# Altium PCB estop-lora-esp32.PcbDoc
Units mil, origin at the board's own origin, x right, y up, seen from the top; angles counter-clockwise.
Board outline 3705.17 x 2376.14 mil, 2 copper layers (Top Layer, Bottom Layer); 7 components, 11 nets, 67 pads, 6 vias.
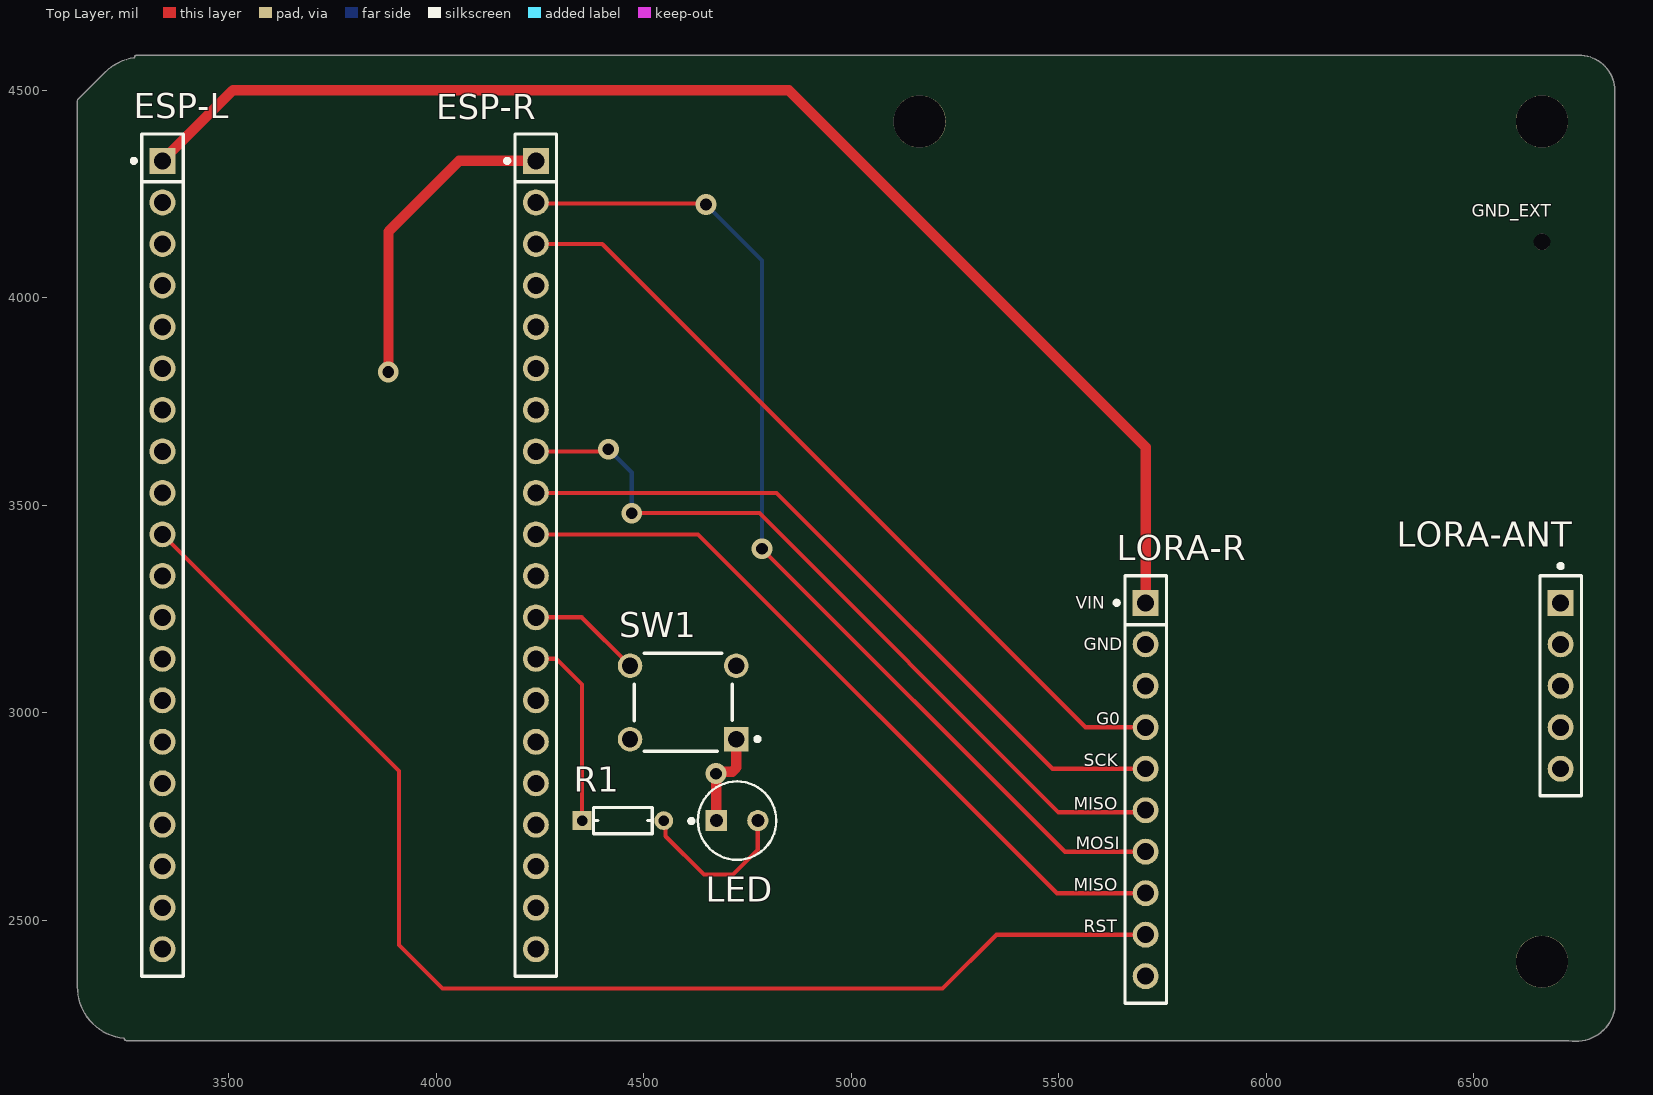
[diagram p0: Top Layer view]
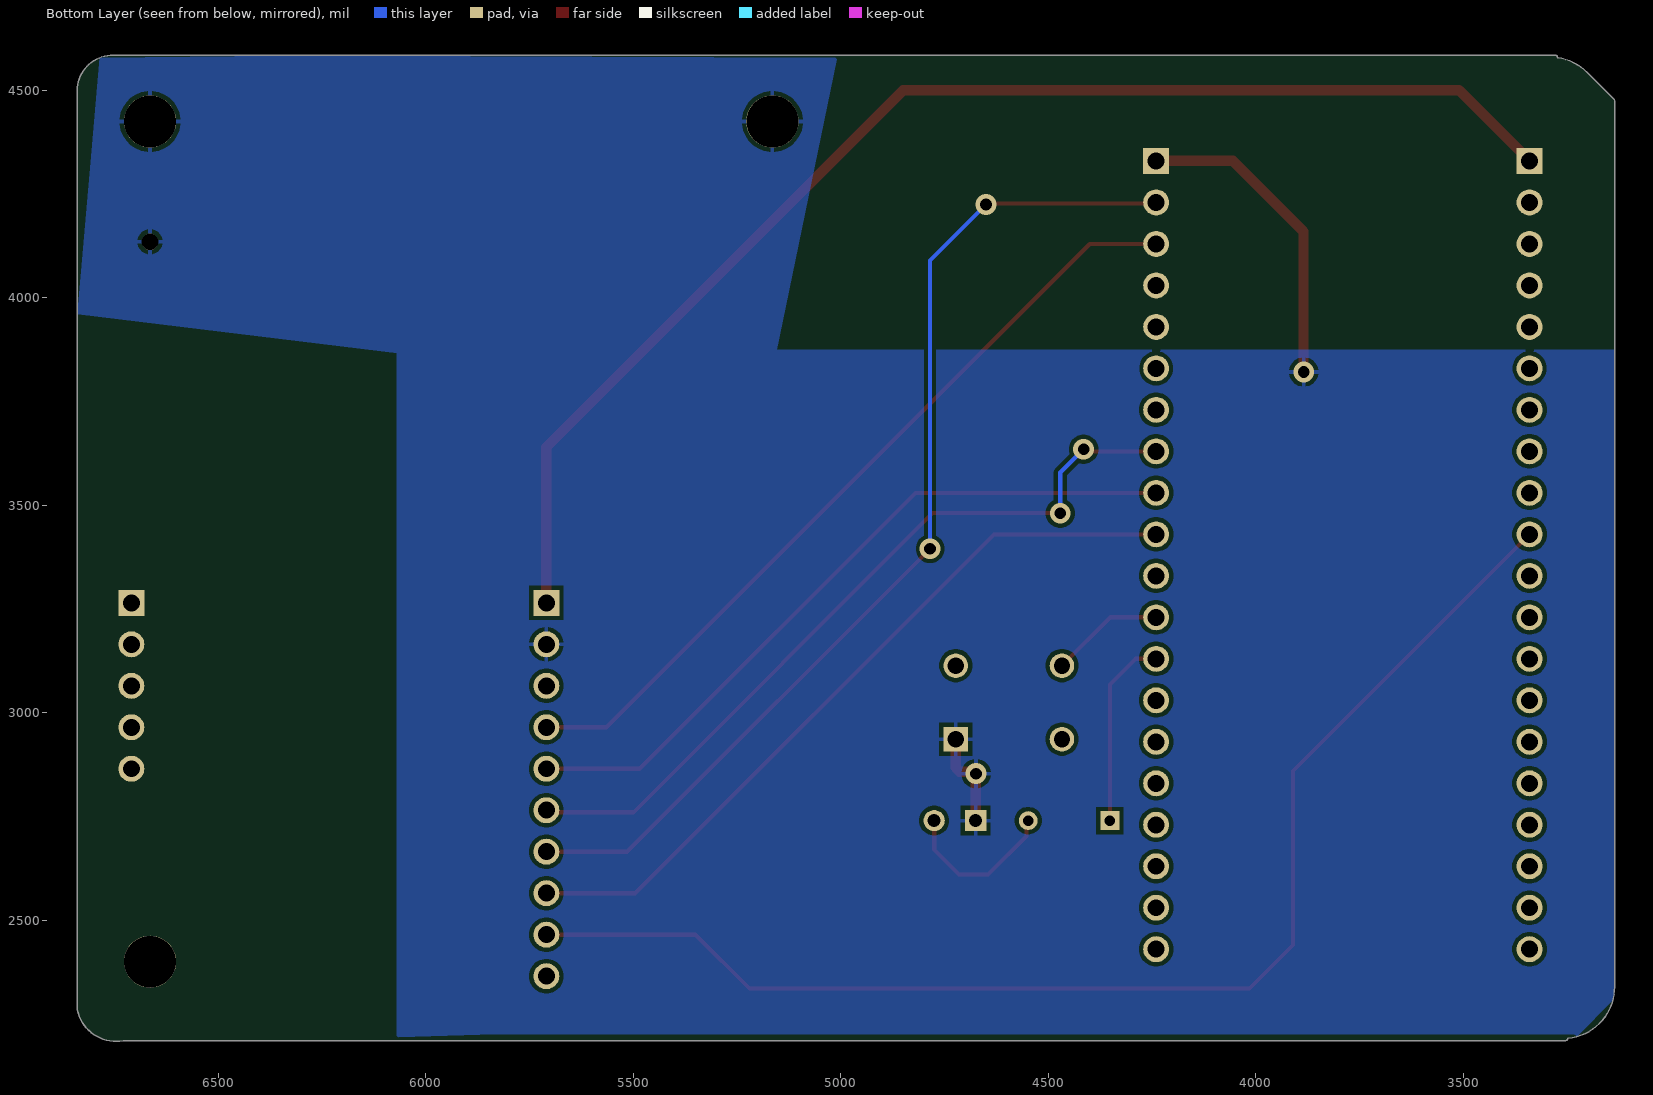
[diagram p1: Bottom Layer view, seen from below]
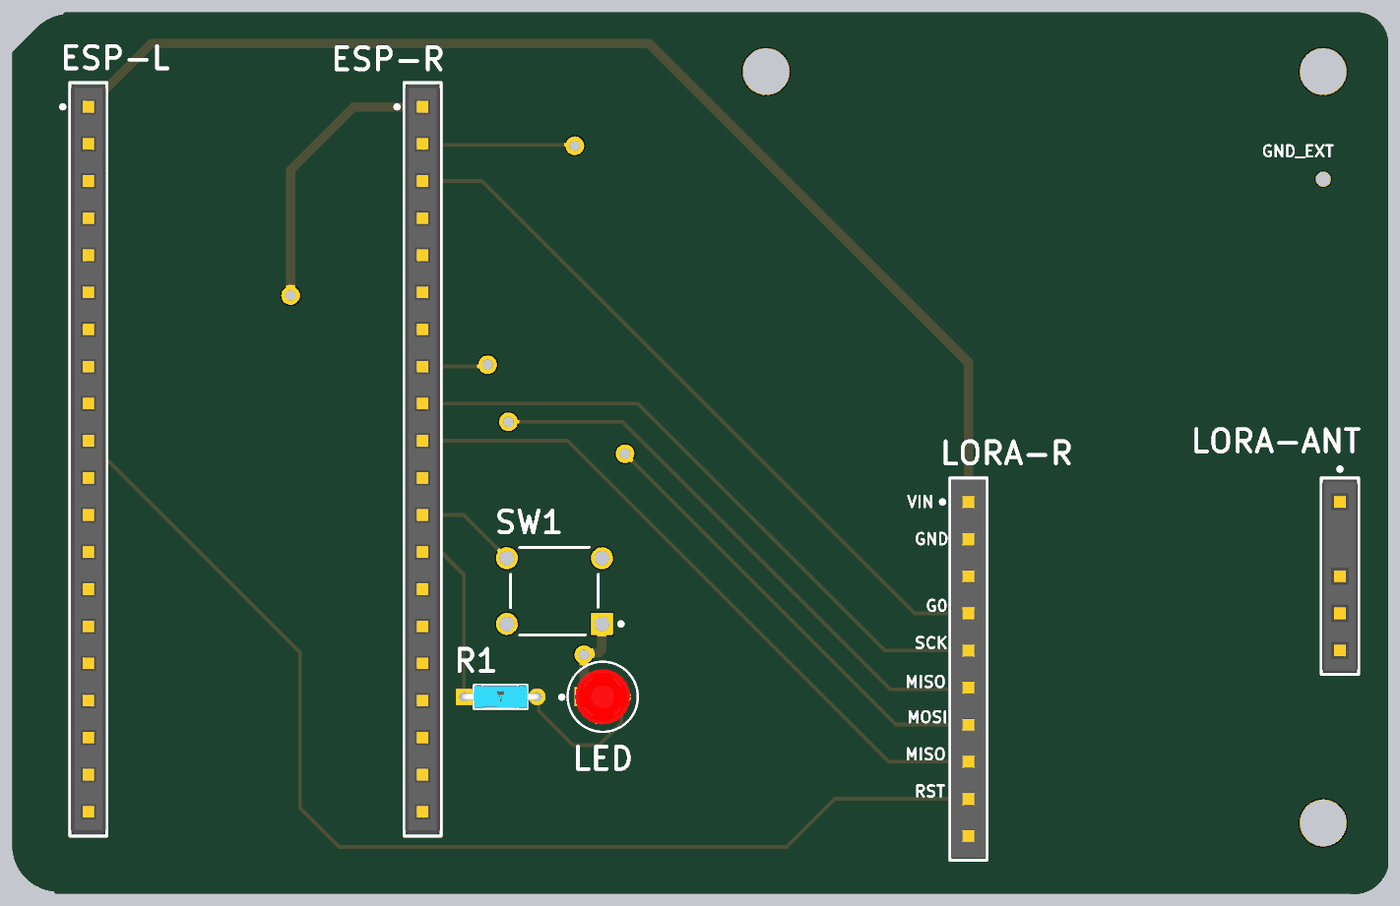
[diagram p2: 3D render of the assembled board from above, using the file's embedded part models]

## Layer stack, top to bottom
Top Solder: solder mask 0.4, Solder Resist, Dk 3.5
Top Layer: signal copper 1.4
Dielectric 1: dielectric 12.6, FR-4, Dk 4.8
Bottom Layer: signal copper 1.4
Bottom Solder: solder mask 0.4, Solder Resist, Dk 3.5

## Board outline
3171.81,2251.1 cw(c3260.71,2340) 3134.99,2340 3134.99,4475 3136.45,4478.55 3201.1,4543.19 cw(c3290,4454.29) 3272.7,4578.82 cw(c3277.68,4579.41) 3277.68,4584.43 6760,4584.43 6760.33,4584.41 cw(c6755.3,4499.7) 6840.15,4499.7 6840.02,4494.85 6840.02,2285 6839.92,2284.02 cw(c6747.49,2302.49) 6729.51,2209.97 3252.94,2209.97 cw(c3252.94,2214.98) 3247.95,2215.48 cw(c3258.99,2338.28)

## Design rules (kind name [scope] priority, off if disabled: settings)
BoardOutlineClearance [All] p1: gap=0.5 ignorepadtopadclearanceinfootprint=FALSE
Clearance [All] p1: gap=10 ignorepadtopadclearanceinfootprint=FALSE
HoleSize [All] p1: absolutevalues=TRUE maxlimit=125 minlimit=1 maxpercent=80.000 minpercent=20.000
PolygonConnect [All] p1: connectstyle=Relief reliefconductorwidth=10 reliefentries=4 polygonreliefangle="90 Angle" airgapwidth=10
RoutingVias [All] p1: holewidth=28 width=50 viastyle="Through Hole" minholewidth=28 minwidth=50 maxholewidth=28 maxwidth=50
SilkToSolderMaskClearance [IsPad] p1: minsilkscreentomaskgap=0 clearancetoexposedcopper=TRUE
SolderMaskExpansion [All] p1: expansion=4 istentingtop=FALSE
Width Width_Power_GND [InNetClass('Power_GND')or InNet('VIN')or InNet('GND')] p1: maxlimit=50 minlimit=20 preferedwidth=25
Width [All] p2: maxlimit=10 minlimit=10 preferedwidth=10
28 further rules are at their usual default settings.

## Components (designator, comment, footprint, x,y, rotation, side; value= is the part's Value field where it differs from the comment)
ESP-L "SSW-120-01-G-S" FP-SSW-120-01-G-S-MFG 3340,3380 r270 top
ESP-R "SSW-120-01-G-S" FP-SSW-120-01-G-S-MFG 4240,3380 r270 top
LED "LTL-1CHEE" FP-LTL-1CHEE-MFG 4725,2740 r0 top
LORA-ANT "SSW-105-01-G-S-002" FP-SSW-105-01-G-S-002-MFG 6710,3065 r270 top
LORA-R "SSW-110-01-G-S" FP-SSW-110-01-G-S-MFG 5709.85,2815 r270 top
R1 "MBA02040C2200FC100" FP-MBA0204-MFG 4450,2740 r0 top value=220Ω
SW1 "B3F-1000" OMRON-B3F-1000-4_V 4595,3025 r180 top

## Footprints (in the part's own frame and the unit in brackets; to place one, negate y for a bottom-side part, rotate by r counter-clockwise, add the part's x,y. Pads: shape width x height; smd on the part's side, far side on the other; paste and mask are expansions set on the pad)
FP-LTL-1CHEE-MFG [mm]
  rect 1.3x1.3 hole 0.8 paste-2539.97 mask+0: 1(-1.27,0)
  round 1.3 hole 0.8 paste-2539.97 mask+0: 2(1.27,0)
  silkscreen extent -2.92,-2.4 2.4,2.4, body extent -2.15,-2.15 2.15,2.15, height 0.25
FP-MBA0204-MFG [mm]
  rect 1.15x1.15 hole 0.65 paste-2539.97 mask+0: 1(-2.5,0)
  round 1.15 hole 0.65 paste-2539.97 mask+0: 2(2.5,0)
  silkscreen extent -1.8,-0.8 1.8,0.8, body extent -3.17,-0.9 3.17,0.9, height 0.25
FP-SSW-105-01-G-S-002-MFG [mm]
  rect 1.59x1.59 hole 1.04 paste-2539.97 mask+0: 1(-5.08,0)
  round 1.59 hole 1.04 paste-2539.97 mask+0: 2(-2.54,0) 3(0,0) 4(2.54,0) 5(5.08,0)
  silkscreen extent -7.45,-1.27 6.73,1.27, body extent -6.83,-1.37 6.83,1.37, height 0.25
FP-SSW-110-01-G-S-MFG [mm]
  rect 1.59x1.59 hole 1.04 paste-2539.97 mask+0: 1(-11.43,0)
  round 1.59 hole 1.04 paste-2539.97 mask+0: 2(-8.89,0) 3(-6.35,0) 4(-3.81,0) 5(-1.27,0) 6(1.27,0) 7(3.81,0) 8(6.35,0) 9(8.89,0) 10(11.43,0)
  silkscreen extent -13.08,-1.9 13.08,1.27, body extent -13.18,-1.37 13.18,1.37, height 0.25
FP-SSW-120-01-G-S-MFG [mm]
  rect 1.59x1.59 hole 1.04 paste-2539.97 mask+0: 1(-24.13,0)
  round 1.59 hole 1.04 paste-2539.97 mask+0: 2(-21.59,0) 3(-19.05,0) 4(-16.51,0) 5(-13.97,0) 6(-11.43,0) 7(-8.89,0) 8(-6.35,0) 9(-3.81,0) 10(-1.27,0) 11(1.27,0) 12(3.81,0) 13(6.35,0) 14(8.89,0) 15(11.43,0) 16(13.97,0) 17(16.51,0) 18(19.05,0) 19(21.59,0) 20(24.13,0)
  silkscreen extent -25.78,-1.87 25.78,1.27, body extent -25.88,-1.37 25.88,1.37, height 0.25
OMRON-B3F-1000-4_V [mm] "TH, 4-Leads, Body 6x6mm"
  rect 1.5x1.5 hole 1 paste-2539.97: 1(-3.25,2.25)
  round 1.5 hole 1 paste-2539.97: 2(3.25,2.25) 4(3.25,-2.25)
  round 1.5 hole 1 paste-2539.97 mask+0.102: 3(-3.25,-2.25)
  silkscreen extent -4.68,-3 3,3, body extent -3,-3 3,3, height 4.5

## Part data
ESP-L ESP-R: library part CMP-00575-00296075-1, "SSW-120-01-G-S SSW - Samtec 2.54mm Single Row Straight Socket Strip 8.5 Profile (mcv)(TO22)", Color=Black, Contact Resistance=10mΩ, Current Rating=6.9A, Manufacturer Lifecycle Status=PRODUCTION, Max Operating Temperature=125°C, Max Voltage Rating (AC)=550V, Min Operating Temperature=-55°C, Voltage Rating (AC)=465V, Voltage Rating (DC)=655V, Connector Type="Receptacle, Socket", Contact Material=Bronze, Contact Plating=Gold, Depth=2.41mm, Gender=Receptacle, Housing Color=Black, Housing Material=Polymer, Lead Free="Lead Free", Lead Length=2.64mm, Lead Pitch=2.54mm, Length=51.31mm, Lifecycle Status=Production, Max Current Rating=6.9A, Mount="Through Hole", NexarPartId=296075, Number of Contacts=20, Number of Positions=20, Number of Rows=1, Orientation=Straight, Pitch=2.54mm, Radiation Hardening=No, REACH SVHC="No SVHC", RoHS=Compliant, Termination=Solder, Voltage Rating=550V
LED: library part CMP-22017-000040-1, "LED RED CLEAR T/H", Case/Package=T, Color=Red, Forward Current=30mA, Forward Voltage=2V, Max Operating Temperature=100°C, Max Power Dissipation=100mW, Min Operating Temperature=-55°C, Package Quantity=1000, Reverse Voltage=5V, Test Current=10mA, Depth=3.8mm, Diameter=3.1mm, Dominant Wavelength=625nm, Height=5.2mm, Illumination Color=Red, Lead Free="Lead Free", Length=3.8mm, Lens Color=Red, Lens Style=Dome, Lens Transparency=Clear, Luminous Intensity=19mcd, Mount="Through Hole", Number of Elements=1, Number of LEDs=1, Number of Pins=2, Packaging=Bulk, Power Dissipation=100mW, Radiation Hardening=No, RoHS Compliant=Yes, Series=-, Viewing Angle=45°, Wavelength=635nm, Width=3.8mm
LORA-ANT: library part CMP-02766-000042-1, "CONN RCPT 5POS 0.1 GOLD PCB", Current Rating=4.7A, Manufacturer=Samtec, Package=HDR4, Temperature="-55°C to +125°C", Temperature Range High=+125°C, Temperature Range Low=-55°C, Voltage Rating=655V, Automotive=No, Category=Conn, ComponentLink2Description=Datasheet, ComponentLink2URL=http://suddendocs.samtec.com/prints/ssw-1xx-xx-xxx-x-xx-xxx-xx-mkt.pdf, Conn Gender=Female, Conn Orientation=Vertical, Contact Material=Gold,Nickel, Device Class L1=Connectors, Device Class L2="Headers and Wire Housings", Device Class L3=unset, Digikey Description="CONN RCPT 5POS 0.1 GOLD PCB", Footprint Url=http://suddendocs.samtec.com/prints/ssw-s.pdf, Height=8.64mm, Is Female=yes, Lead Free=Yes, Manufacturer Part Number=SSW-105-01-G-S-002, Number of Contacts=4, Number of Rows=1, Octopart=https://octopart.com/ssw-105-01-g-s-002-samtec-17275695, Pitch=2.54mm, RoHS=TRUE
LORA-R: library part CMP-1272-00002-2, Color=Black, Contact Resistance=10mΩ, Current Rating=6.9A, Manufacturer Lifecycle Status=PRODUCTION, Max Operating Temperature=125°C, Max Voltage Rating (AC)=550V, Min Operating Temperature=-55°C, Voltage Rating (AC)=465V, Voltage Rating (DC)=655V, Connector Type=Socket, Contact Material=Bronze, Contact Plating=Gold, Depth=2.41mm, Gender=Receptacle, Housing Color=Black, Lead Free="Lead Free", Lead Length=2.64mm, Lead Pitch=2.54mm, Length=25.91mm, Lifecycle Status=Production, Max Current Rating=6.9A, NexarPartId=296065, Number of Contacts=10, Number of Positions=10, Number of Rows=1, Orientation=Vertical, Packaging=Bulk, Pitch=2.54mm, Radiation Hardening=No, REACH SVHC="No SVHC", RoHS=Compliant, Termination=Solder, Voltage Rating=550V
R1: library part CMP-02408-000005-1, "RES 220 OHM 0.4W 1% AXIAL", Manufacturer="Vishay BC Components", Package=MBA0204, Power Rating=0.25W, Resistance=220Ω, Temperature="-55°C to +125°C", Temperature Coefficient=50ppm/°C, Temperature Range High=+125°C, Temperature Range Low=-55°C, Tolerance=1%, Voltage Rating=200V, Automotive=Yes, Automotive Grade="Grade 1", Category=Res, ComponentLink2Description=Datasheet, ComponentLink2URL=http://www.vishay.com/docs/28766/mbxsma.pdf, Composition="Metal Film", Device Class L1="Passive Components", Device Class L2=Resistors, Device Class L3="Through-Hole Resistors", Digikey Description="RES 220 OHM 0.4W 1% AXIAL", Height=1.6mm, Ipc Land Pattern Name=RESAD500W65L360D160, Lead Free=Yes, Manufacturer Part Number=MBA02040C2200FC100, Mouser Description="Thin Film Resistors - Through Hole .4watt 220ohms 1% 1/8watt body size", Octopart=https://octopart.com/mba02040c2200fc100-vishay-43743094, RoHS=TRUE, Series="MBA/SMA 0204"
SW1: library part CMP-1677-00002-1, "Tactile Switch, SPST-NO, 0.05 A, 5 to 24 V, -25 to 70 degC, 4-Pin THD, RoHS, Bulk", Capacitance="-45 f", Current Rating="1.5 A", Max Operating Temperature="70 degC", Min Operating Temperature="-40 degC", Package Quantity=1080, Voltage Rating="150 V", ComponentLink1Description="Manufacturer URL", ComponentLink1URL=http://www.omron.com/, ComponentLink2Description=Datasheet, ComponentLink2URL=http://www.omron.com/ecb/products/pdf/en-b3f.pdf, Contact Material=Brass, Contact Plating=Gold, DatasheetVersion=Jan-15, Gender=Female, Height="14.99 mm", Lead Pitch="1.27 mm", Length="18.34 mm", Mount="Through Hole", PackageDescription="4-Pin Through Hole Device, Body 6 x 6 mm", PackageReference=B3F-1000, Packaging=Tray, Pins=8, Radiation Hardening=No, RoHSCompliant=true, Shielding=Shielded, Width="25.4 mm"

## Free pads (board coordinates)
  round 125.98 hole 125: 4(6665,4425) 6(5165,4425) 7(6665,2400)
  round 39.37 hole 40: 5(6665,4135)

## Via types
v1: diameter 50, hole 28, Top Layer to Bottom Layer, 6 vias

## Nets (pads, with @x,y where several pads share a name; then routed paths per layer and width w, separated by ;. In a path a pad name is that pad's centre, name@x,y a point inside that pad or via, vN(x,y) a via of type N, cw(c..) or ccw(c..) an arc to the next point about the centre after c; other vN are vias at no path point)
CS: ESP-R.10 LORA-R.8 | length 1828.1
  Top Layer w10: ESP-R.10 4630.86,3430 5495.86,2565 LORA-R.8
G0: ESP-R.3 LORA-R.4 | length 1952.4
  Top Layer w10: ESP-R.3 4400,4130 5565,2965 LORA-R.4
GND: ESP-R.1 LED.1 LORA-R.2 pad.4 pad.5 pad.6 SW1.1 | length 1001.3
  Top Layer w25: v1(3884.57,3821.27) 3885,3821.7 3885,4160 4055,4330 ESP-R.1 ; LED.1 4675,2852.46 v1(4674.15,2853.31) 4678.93,2858.1 4713.09,2858.1 4722.95,2867.96 SW1.1
MISO: ESP-R.8 LORA-R.6 | length 1891.5
  Top Layer w10: ESP-R.8 4410,3630 v1(4415,3635) ; v1(4471.28,3481.11) 4778.89,3481.11 5500,2760 LORA-R.6@5709.85,2760
  Bottom Layer w10: v1(4415,3635) 4471.28,3578.72 v1(4471.28,3481.11)
MOSI: ESP-R.2 LORA-R.7 | length 2525.2
  Top Layer w10: ESP-R.2 4242.5,4227.5 4647.5,4227.5 v1(4650,4225) ; v1(4785,3395) 5515,2665 LORA-R.7
  Bottom Layer w10: v1(4650,4225) 4785,4090 v1(4785,3395)
NetESP-R_12: ESP-R.12 SW1.4 | length 275.3
  Top Layer w10: ESP-R.12 4350.63,3230 SW1.4
NetESP-R_13: ESP-R.13 R1.1 | length 465.5
  Top Layer w10: ESP-R.13 4290,3130 4351.57,3068.43 R1.1
NetLED_2: LED.2 R1.2 | length 394.9
  Top Layer w10: R1.2 4552.64,2735.79 4552.64,2702.36 4645,2610 4715,2610 4775,2670 LED.2
RST: ESP-L.10 LORA-R.9 | length 3123.3
  Top Layer w10: ESP-L.10 3910,2860 3910,2440 4015,2335 5220,2335 5350,2465 LORA-R.9
SCK: ESP-R.9 LORA-R.5 | length 1745.3
  Top Layer w10: ESP-R.9 4820,3530 5485,2865 LORA-R.5
VIN: ESP-L.1 LORA-R.1 | length 3171.6
  Top Layer w25: ESP-L.1 3510,4500 4850,4500 5710,3640 LORA-R.1@5710,3265
pads on no net: ESP-L.2 ESP-L.3 ESP-L.4 ESP-L.5 ESP-L.6 ESP-L.7 ESP-L.8 ESP-L.9 ESP-L.11 ESP-L.12 ESP-L.13 ESP-L.14 ESP-L.15 ESP-L.16 ESP-L.17 ESP-L.18 ESP-L.19 ESP-L.20 ESP-R.4 ESP-R.5 ESP-R.6 ESP-R.7 ESP-R.11 ESP-R.14 ESP-R.15 ESP-R.16 ESP-R.17 ESP-R.18 ESP-R.19 ESP-R.20 LORA-ANT.1 LORA-ANT.2 LORA-ANT.3 LORA-ANT.4 LORA-ANT.5 LORA-R.3 LORA-R.10 SW1.2 SW1.3

## Polygon pours and split planes (outlines as drawn)
GND on Bottom Layer "GND_L02_P000" (solid, pour order 0): 3136.44,3875 3135.59,2310.11 3226.37,2219.33 3232.03,2225 5830,2225 6070,2218.32 6070,3875
GND on Bottom Layer "GND_L02_P001" (solid, pour order 1): 6840.17,3960.27 6785.99,4578.82 6305.58,4584.42 5009.33,4578.54 5177.99,3757.99

## Silkscreen, mask and mechanical layers (free items; w line width, h text height)
Top Overlay:
  text "GND_EXT" at 6496,4196 h30
  text "VIN" at 5541,3251 h30
  text "GND" at 5561,3151 h30
  text "G0" at 5591,2971 h30
  text "SCK" at 5561,2871 h30
  text "MISO" at 5536,2766 h30
  text "MOSI" at 5541,2671 h30
  text "MISO" at 5536,2571 h30
  text "RST" at 5561,2471 h30
Mechanical 1:
  lines w10: 3252.94,2214.98 6730,2214.98 ccw(c6747.49,2302.49) 6835,2285 6835,4495 ccw(c6755.3,4499.7) 6760,4579.41 3277.68,4579.41 ; 3258.99,2220 cw(c3258.99,2338.28) 3175.36,2254.64 cw(c3260.71,2340) 3140,2340 3140,4475 3204.64,4539.64 cw(c3290,4454.29) 3290,4575